# Altium PCB VIDEO_OUT.PcbDoc
Units mil, origin at the board's own origin, x right, y up, seen from the top; angles counter-clockwise.
Board outline 666 x 458 mil, 2 copper layers (Top Layer, Bottom Layer); 10 components, 6 nets, 20 pads, 3 vias.
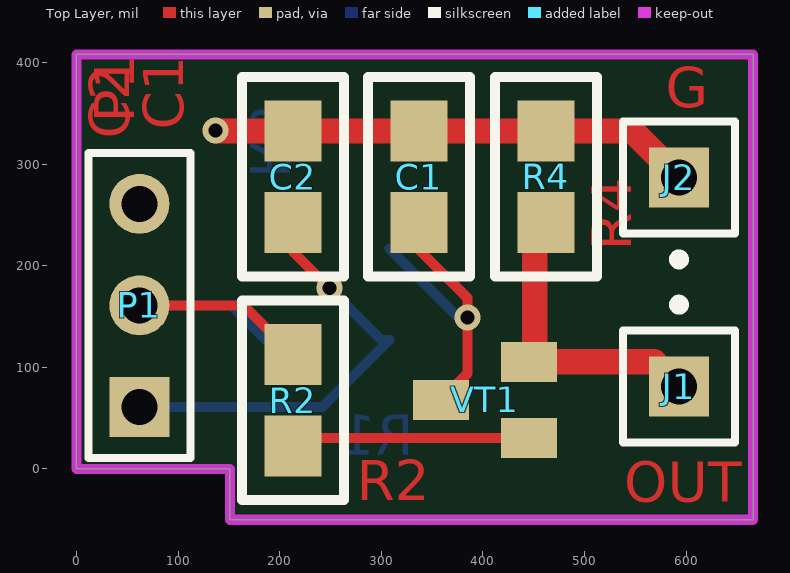
[diagram p0: Top Layer view]
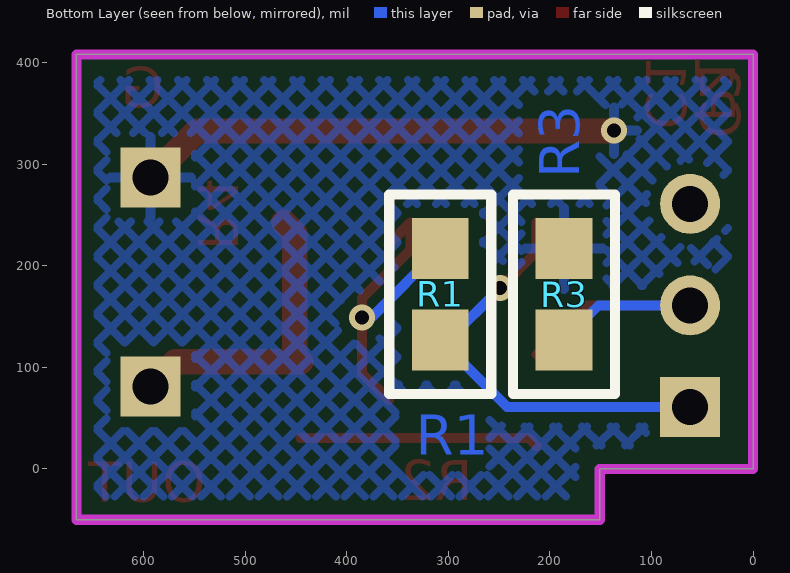
[diagram p1: Bottom Layer view, seen from below]

## Layer stack, top to bottom
Top Solder: solder mask 0.4, Solder Resist, Dk 3.5
Top Layer: signal copper 1.4
Dielectric 1: dielectric 12.6, FR-4, Dk 4.8
Bottom Layer: signal copper 1.4
Bottom Solder: solder mask 0.4, Solder Resist, Dk 3.5

## Board outline
0,0 151,0 151,-50 666,-50 666,408 0,408

## Design rules (kind name [scope] priority, off if disabled: settings)
Clearance [All] p1: gap=10
PolygonConnect [All] p1: connectstyle=Relief reliefconductorwidth=10 reliefentries=4 polygonreliefangle="90 Angle" airgapwidth=10
RoutingVias [All] p1: holewidth=28 width=50 viastyle="Through Hole" minholewidth=28 minwidth=50 maxholewidth=28 maxwidth=50
SolderMaskExpansion [All] p1: expansion=4
Width [All] p1: maxlimit=39.37 minlimit=4.72 preferedwidth=10
29 further rules are at their usual default settings.

## Classes and differential pairs
component class Sheet: C1 C2 J1 P1 R1 R2 R3 R4 VT1

## Components (designator, comment, footprint, x,y, rotation, side; value= is the part's Value field where it differs from the comment)
C1 "0,1" CAP_SMALL 387,189 r90 top
C2 "0,1" CAP_SMALL 263,189 r90 top
J1 "OUT" PIN1 593,81 r0 top
J2 "G" PIN1 593,287 r180 top (schematic designator J1)
P1 "Гребенка" HDR1X3 62,61 r90 top
R1 "10" RES 259,269.71 r0 bottom
R2 "100" RES 164,-30 r0 top
R3 "3к" RES 137.13,269.71 r0 bottom
R4 "4.64к" RES 511,385.42 r180 top
VT1 "КТ3130" SOT23-BEC_MMBT3640*(Primary) 402,68 r90 top

## Footprints (in the part's own frame and the unit in brackets; to place one, negate y for a bottom-side part, rotate by r counter-clockwise, add the part's x,y. Pads: shape width x height; smd on the part's side, far side on the other; paste and mask are expansions set on the pad)
CAP_SMALL [mil] "FROM_MAX"
  rect 60x55.98 smd: 1(53.71,50) 2(143.71,50)
  silkscreen extent 1,0 197,100, body extent 20,18 178,82, height 100
HDR1X3 [mm] "Connector; Header; 3 Position"
  rect 1.5x1.5 hole 0.9: 1(0,0)
  round 1.5 hole 0.9: 2(2.54,0) 3(5.08,0)
  silkscreen extent -1.27,-1.27 6.35,1.27
PIN1 [mm] "Connector; Plug"
  rect 1.5x1.5 hole 0.9: 1(0,0)
  silkscreen extent -1.4,-1.4 1.4,2.17
RES [mil] "FROM_MAX"
  rect 55.98x60 smd: 1(49,52.71) 2(49,142.71)
  silkscreen extent -1,0 99,196, body extent 17,19 81,177, height 100
SOT23-BEC_MMBT3640*(Primary) [mm]
  rect 1x1.4 smd: 1(-0.95,-1.1) 2(0.95,-1.1) 3(0,1.1)

## Part data
C1 C2: library part CAP_SMALL
J1 J2: library part Socket, "Socket"
P1: library part "Header 3", "Header, 3-Pin"
R1 R2 R3 R4: library part RES
VT1: library part MMBT3640

## Via types
v1: diameter 25.59, hole 13.78, Top Layer to Bottom Layer, 3 vias

## Nets (pads, with @x,y where several pads share a name; then routed paths per layer and width w, separated by ;. In a path a pad name is that pad's centre, name@x,y a point inside that pad or via, vN(x,y) a via of type N, cw(c..) or ccw(c..) an arc to the next point about the centre after c; other vN are vias at no path point)
GND: C1.2 C2.2 J2.1 R3.1 R4.1 | length 475.1
  Top Layer w25: v1(137,333) 137.29,332.71 C2.2 C1.2 R4.1 547.29,332.71 J2.1
NetC1_1: C1.1 R1.1 VT1.3 | length 341.3
  Top Layer w10: VT1.3 385,94.31 v1(385,149) 385,168 337,216 C1.1 C1.1@358.69,221.02
  Bottom Layer w10: R1.1 376,149 v1(385,149)
NetC2_1: C2.1 P1.1 R1.2 | length 433.1
  Top Layer w10: C2.1 213,214 v1(249,178)
  Bottom Layer w10: P1.1 242,61 R1.2 300,127 v1(249,178)
NetJ1_1: J1.1 R4.2 VT1.2 | length 302
  Top Layer w25: R4.2 451,231.71 451,111.1 VT1.2 568.6,105.4 J1.1
NetP1_2: P1.2 R2.2 R3.2 | length 309.2
  Top Layer w10: P1.2 164.71,161 R2.2
  Bottom Layer w10: P1.2 152.13,161 R3.2
NetR2_1: R2.1 VT1.1 | length 235.6
  Top Layer w10: R2.1 220.89,30.6 VT1.1
pads on no net: P1.3

## Polygon pours and split planes (outlines as drawn)
GND on Bottom Layer "Top Layer-No Net" (hatched 45Degree grid 20 track 8, remove dead copper, pour order 2): 25,383 25,23 175,23 175,-27 645,-27 645,383 25,383

## Keep-outs
Keep-Out Layer:
  lines w10: 0,0 151,0 151,-50 666,-50 666,408 149,408 0,408 0,0